# Altium PCB ATT-Light.PcbDoc (part 2 of 2)
Units mm, origin at the board's own origin, x right, y up, seen from the top; angles counter-clockwise.
Board outline 140.3 x 94.24 mm, 2 copper layers (Top Layer, Bottom Layer); 125 components, 78 nets, 490 pads, 126 vias.
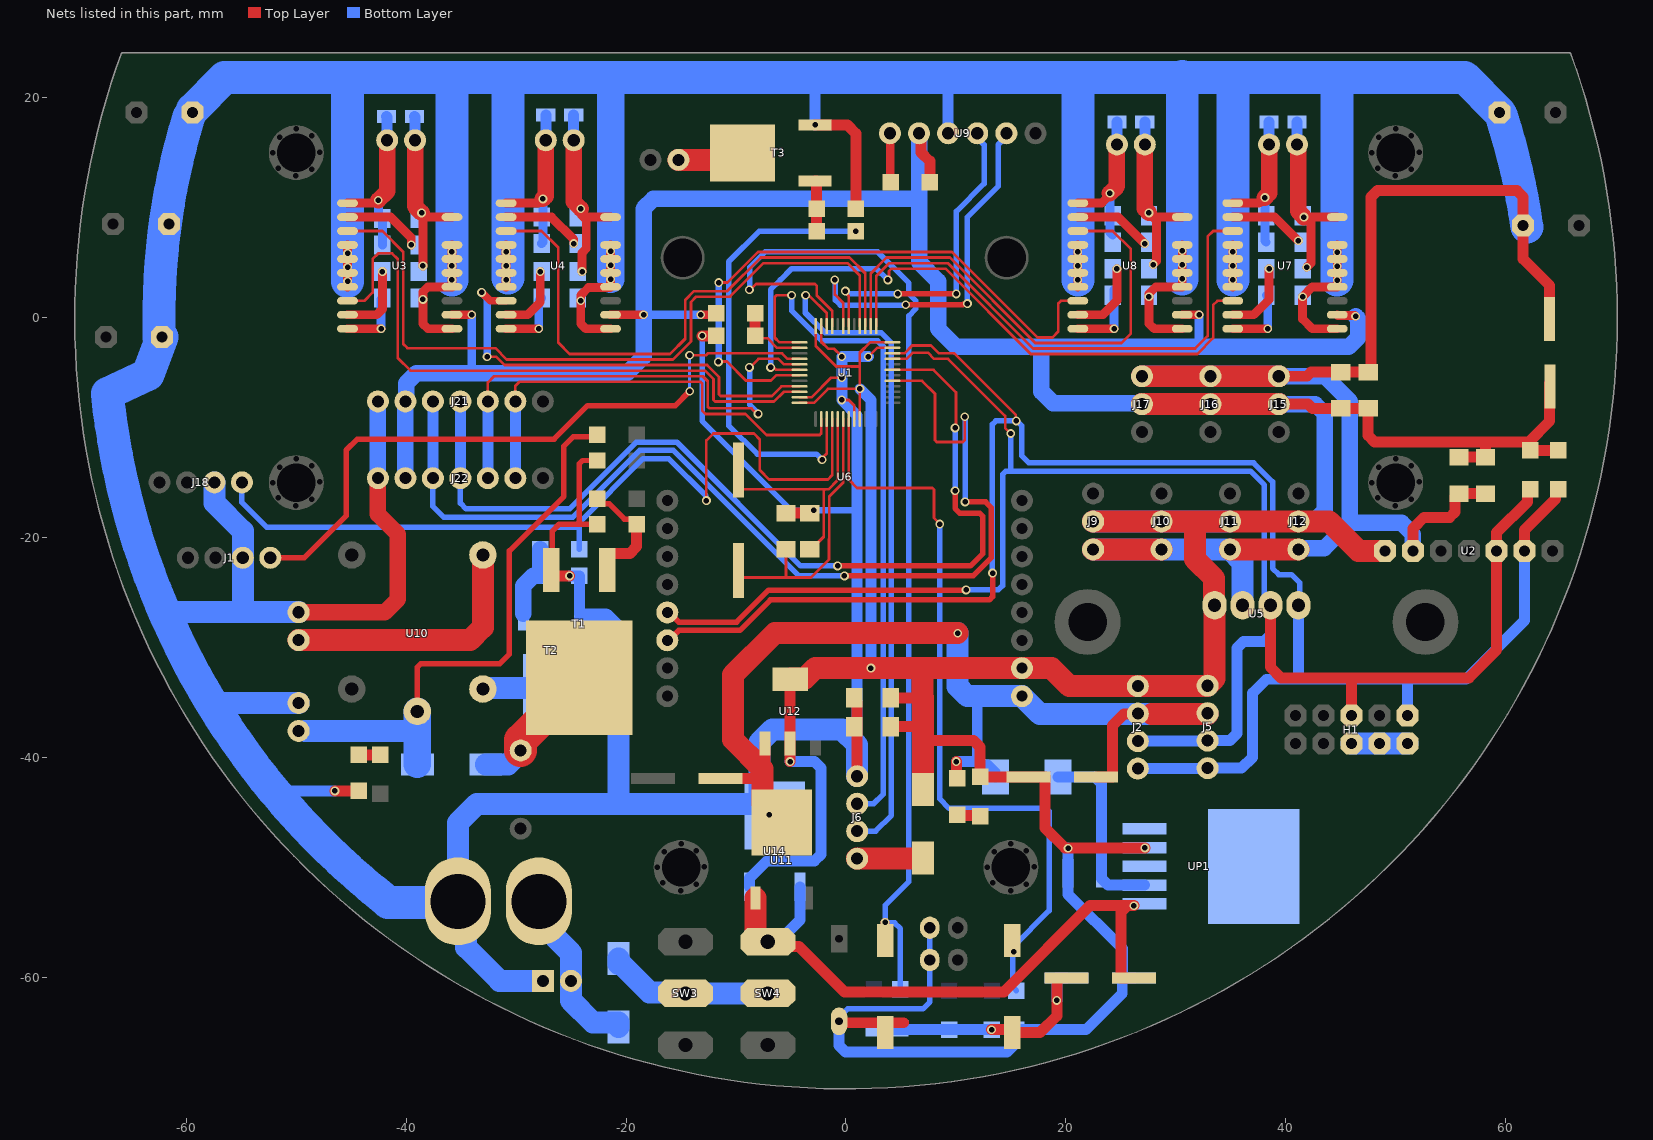
[diagram p2: the nets of this part, all layers, seen from the top]

## Via types
v1: diameter 0.8, hole 0.5, Top Layer to Bottom Layer, tented both sides, 126 vias

## Nets (pads, with @x,y where several pads share a name; then routed paths per layer and width w, separated by ;. In a path a pad name is that pad's centre, name@x,y a point inside that pad or via, vN(x,y) a via of type N, cw(c..) or ccw(c..) an arc to the next point about the centre after c; other vN are vias at no path point) (continued)
GND: C1.2 C2.2 C9.2 C10.2 C17.1 C18.2 C19.1 C20.1 C21.1 C22.1 C23.1 C24.2 C25.1 C26.1 C27.1 C28.1 C29.1 C30.1 C31.1 C32.1 C33.1 C35.1 D1.1 D2.1 D3.1 D4.1 D6.1 D7.1 D8.1 D9.1 D11.2 D13.2 D14.1 H1.6 H1.8 H1.10 J1.3 J2.2 J5.2 J6.1 J9.1 J10.1 J11.1 J12.1 J13.2 J14.2 J15.1 J16.1 J17.1 J18.3 j19.2 J20.2 J21.1 J22.1 R8.1 R9.2 R10.2 R11.2 R12.2 R15.1 R16.1 R17.2 R21.2 SW2.1 T1.3 T2.3 T3.3 U1.8 U1.23 U1.35 U1.47 U2.2 U3.1 U3.4 U3.5 U3.6 U3.7 U3.14 U3.15 U3.16 U3.17 U4.1 U4.4 U4.5 U4.6 U4.7 U4.14 U4.15 U4.16 U4.17 U5.2 U6.9 U7.1 U7.4 U7.5 U7.6 U7.7 U7.14 U7.15 U7.16 U7.17 U8.1 U8.4 U8.5 U8.6 U8.7 U8.14 U8.15 U8.16 U8.17 U9.3 U11.4 U12.1 U14.4 UP1.3 UP1.5 UP1.6 | length 997.6
  Top Layer w0.25: U1.47@-4.225,-7.25 -3.131,-7.25 -1.342,-5.461 v1(-0.381,-5.461) ; U1.35@-2.25,-0.775 -2.25,-2.195 -1.622,-2.823 -1.114,-2.823 v1(-0.381,-3.556) ; v1(-0.381,-7.493) 0.254,-7.493 0.75,-7.989 U1.8@0.75,-9.225 ; v1(2.032,-3.556) 2.838,-2.75 U1.23@4.225,-2.75
  Top Layer w0.5: T1.3@-26.797,-22.941 -26.729,-22.873 -26.729,-19.441 -26.084,-18.796 -24.257,-18.796 ; R15.1@-22.606,-18.796 -24.257,-18.796 ; R16.1@-22.606,-12.997 -23.964,-12.997 -24.257,-13.29 -24.257,-18.796
  Top Layer w0.8: U3.17@-45.339,2.794 v1(-45.339,3.302) U3.16@-45.339,4.064 v1(-45.339,4.572) U3.15@-45.339,5.334 v1(-45.339,5.842) U3.14@-45.339,6.604 ; U3.1@-35.839,-1.016 -38.012,-1.016 -38.481,-0.547 v1(-38.481,1.651) -38.481,2.325 -38.012,2.794 U3.4@-35.839,2.794 v1(-35.839,3.429) U3.5@-35.839,4.064 U3.6@-35.839,5.334 U3.7@-35.839,6.604 ; U4.17@-30.912,2.794 v1(-30.912,3.429) U4.16@-30.912,4.064 v1(-30.912,4.699) U4.15@-30.912,5.334 v1(-30.912,5.969) U4.14@-30.912,6.604 ; U4.1@-21.412,-1.016 -23.661,-1.016 -24.13,-0.547 v1(-24.13,1.524) -24.13,2.032 -23.418,2.744 -21.462,2.744 U4.4@-21.412,2.794 v1(-21.412,3.505) U4.5@-21.412,4.064 v1(-21.412,4.775) U4.6@-21.412,5.334 v1(-21.412,6.045) U4.7@-21.412,6.604 ; U8.17@21.084,2.794 U8.16@21.084,4.064 U8.15@21.084,5.334 U8.14@21.084,6.604 ; U8.1@30.584,-1.016 28.028,-1.016 27.559,-0.547 v1(27.559,1.905) 27.559,2.159 28.194,2.794 U8.4@30.584,2.794 v1(30.584,3.533) U8.5@30.584,4.064 v1(30.584,4.803) U8.6@30.584,5.334 v1(30.584,6.073) U8.7@30.584,6.604 ; U7.17@35.179,2.794 v1(35.179,3.429) U7.16@35.179,4.064 v1(35.179,4.699) U7.15@35.179,5.334 v1(35.179,5.969) U7.14@35.179,6.604 ; U7.1@44.679,-1.016 42.418,-1.016 41.529,-0.127 v1(41.529,1.905) 42.418,2.794 U7.4@44.679,2.794 v1(44.679,3.404) U7.5@44.679,4.064 v1(44.679,4.674) U7.6@44.679,5.334 v1(44.679,5.944) U7.7@44.679,6.604
  Top Layer w1: v1(-46.482,-43.053) D11.2@-44.323,-43.053 ; T1.3@-26.797,-22.941 -26.797,-23.245 -26.547,-23.495 v1(-25.146,-23.495) ; v1(-13.081,-1.651) R8.1@-11.811,-1.651 ; C20.1@-11.43,-41.91 -7.592,-41.91 -7.38,-41.91 U12.1@-7.38,-38.739 ; C24.2@-5.461,-17.78 C18.2@-3.302,-17.78 ; v1(-2.798,17.526) 0.127,17.526 0.889,16.764 R21.2@0.889,9.906 ; C30.1@0.762,-34.586 0.762,-34.711 1.016,-34.965 J6.1@1.016,-41.713 ; v1(10.033,-40.386) 10.033,-41.834 D13.2@10.109,-41.91 ; v1(13.237,-64.77) 14.863,-64.77 15.113,-65.02 SW2.1@15.113,-65.024 17.653,-65.024 19.177,-63.5 v1(19.177,-62.103) 19.177,-60.071 C31.1@20.066,-60.071 ; C21.1@22.733,-41.783 24.233,-41.783 24.233,-37.108 25.273,-36.068 27.813,-36.068 ; J15.1@39.362,-5.334 41.935,-5.334 42.316,-4.953 C32.1@44.994,-4.953 C33.1@47.498,-4.953 ; C33.1@47.502,-4.953 C33.1@47.498,-4.953 ; C33.1@47.752,-4.703 47.752,10.971 48.338,11.557 61.009,11.557 61.595,10.971 C26.1@61.595,8.382 61.595,5.334 64.008,2.921 C22.1@64.008,-0.127 ; C33.1@47.873,-4.578 47.873,-4.703 47.623,-4.953 C33.1@47.498,-4.953 ; U2.2@51.562,-21.209 51.562,-19.177 52.578,-18.161 54.913,-18.161 55.378,-17.696 55.378,-16.252 55.628,-16.002 C17.1@55.753,-16.002 C19.1@58.166,-16.002
  Top Layer w1.5: J13.2@-49.784,-26.797 -41.939,-26.797 -40.767,-25.625 -40.767,-19.685 -42.575,-17.877 J22.1@-42.575,-14.605
  Top Layer w2: U11.4@-5.842,-45.937 -7.592,-44.187 -7.592,-41.91 -7.592,-41.049 -10.287,-38.354 -10.287,-32.512 -6.477,-28.702 v1(10.16,-28.702) ; J9.1@22.479,-21.082 J10.1@28.702,-21.082 ; J17.1@26.921,-5.334 J16.1@33.141,-5.334 J15.1@39.362,-5.334 ; 27.813,-36.068 J5.2@32.893,-36.068 ; J11.1@34.925,-21.082 J12.1@41.148,-21.082
  Top Layer w3: j19.2@-35.433,-53.213 j19.2@-35.306,-53.086
  Bottom Layer w0.5: v1(-13.081,-1.651) -13.081,-9.398 -4.953,-17.526 v1(-2.921,-17.526)
  Bottom Layer w0.6: v1(-2.921,-17.526) 1.016,-17.526
  Bottom Layer w1: -52.815,-42.075 -52.472,-42.418 -51.837,-43.053 v1(-46.482,-43.053) ; v1(-25.146,-23.495) -24.26,-23.495 R17.2@-24.257,-23.498 T2.3@-24.257,-26.938 ; v1(-2.798,17.526) -2.798,21.844 ; 1.016,-38.862 1.016,-17.526 1.016,-8.89 v1(-0.381,-7.493) v1(-0.381,-5.461) v1(-0.381,-3.556) v1(2.032,-3.556) ; 3.81,-64.77 4.953,-64.77 R12.2@9.398,-64.77 10.983,-64.77 v1(13.237,-64.77) ; U9.3@9.289,16.764 9.289,21.481 9.652,21.844 ; v1(10.033,-40.386) 11.938,-40.386 ; 11.938,-34.431 11.938,-40.386 ; D14.1@13.589,-41.783 13.589,-41.433 12.864,-40.708 12.514,-40.708 12.192,-40.386 11.938,-40.386 ; v1(19.177,-62.103) 19.177,-60.071 C35.1@20.066,-60.071
  Bottom Layer w1.5: -66.793,-9.994 -66.753,-10.033 ; J22.1@-42.671,-14.701 J22.1@-42.575,-14.605 J21.1@-42.575,-7.62 ; J15.1@39.362,-5.334 43.561,-5.334 45.819,-7.592 45.819,-18.642 ; J12.1@41.148,-21.082 41.244,-20.986 43.475,-20.986 ; 43.502,-20.986 45.819,-18.669 50.546,-18.669 51.562,-19.685 U2.2@51.562,-21.209
  Bottom Layer w2: -64.068,-21.356 -63.834,-21.59 ; -61.873,-27.061 -61.608,-26.797 -54.864,-26.797 ; -60.927,-29.128 -60.845,-29.21 ; J18.3@-57.444,-14.986 -57.444,-16.851 -54.864,-19.431 J1.3@-54.864,-21.844 -54.864,-26.797 ; -57.15,-35.052 J14.2@-49.784,-35.052 ; J13.2@-49.784,-26.797 -54.864,-26.797 ; J20.2@-27.559,-60.325 -31.496,-60.325 -34.541,-57.28 -34.541,-53.851 j19.2@-35.306,-53.086 -35.306,-45.974 -33.56,-44.228 -20.701,-44.228 ; T2.3@-23.757,-27.438 -21.938,-27.438 -20.701,-28.675 -20.701,-44.228 ; U14.4@-6.763,-44.989 U14.4@-7.524,-44.228 ; -6.702,-37.465 -7.874,-38.637 -7.874,-43.878 U14.4@-7.524,-44.228 ; -6.702,-37.465 -0.381,-37.465 1.016,-38.862 J6.1@1.016,-41.713 ; v1(10.16,-28.702) 10.16,-33.556 11.035,-34.431 11.938,-34.431 U6.9@16.002,-34.431 17.639,-36.068 J5.2@32.893,-36.068 ; J9.1@22.479,-21.082 J10.1@28.702,-21.082 J11.1@34.925,-21.082 36.068,-22.225 U5.2@36.068,-26.162 U5.2@36.03,-26.2 ; J17.1@26.921,-5.334 J16.1@33.141,-5.334 J15.1@39.362,-5.334 ; H1.6@45.974,-38.735 H1.8@48.514,-38.735 H1.10@51.054,-38.735 ; -20.701,-44.228 U14.4@-7.524,-44.228
  Bottom Layer w2.5: v1(-21.412,3.505) v1(-21.412,4.775) v1(-21.412,6.045) -21.412,21.92
  Bottom Layer w3: C29.1@-62.473,-1.822 cw(c0,0) C28.1@-59.769,18.273 ; C29.1@-62.234,-1.778 -62.276,-1.894 -63.479,-5.177 -67.184,-6.895 ccw(c-0.037,0.005) -41.875,-52.965 ; C28.1@-59.436,18.923 -56.515,21.844 -45.339,21.844 -39.116,21.844 -35.839,21.844 ; v1(-45.339,3.302) v1(-45.339,4.572) v1(-45.339,5.842) -45.339,21.717 ; -41.656,-53.213 j19.2@-35.433,-53.213 ; v1(-35.839,3.429) v1(-35.839,4.699) v1(-35.839,5.969) -35.839,21.844 ; v1@-30.734,3.607 v1@-30.734,5.791 ; v1@-30.734,6.147 -30.734,21.844 ; v1(21.082,3.429) v1(21.082,4.699) v1(21.082,5.969) 21.082,21.844 ; v1(30.584,3.533) v1(30.584,4.803) v1(30.584,6.073) 30.584,21.844 ; 30.584,21.948 30.584,21.844 ; v1(35.179,3.429) v1(35.179,4.699) v1(35.179,5.969) 35.179,21.844 ; v1(44.679,3.404) v1(44.679,4.674) v1(44.679,5.944) 44.679,21.819 ; C25.1@59.436,18.669 56.261,21.844 44.679,21.844 41.148,21.844 38.481,21.844 35.179,21.844 ; C25.1@59.589,18.419 cw(c2.328,-0.068) C26.1@61.922,8.247 ; -35.839,21.844 -30.734,21.844 ; -30.734,21.844 -27.305,21.844 -24.765,21.844 -21.412,21.844 -2.798,21.844 9.652,21.844 21.082,21.844 ; 21.082,21.844 24.511,21.844 27.178,21.844 30.584,21.844 ; 30.584,21.844 35.179,21.844
  other v1: -6.985,-45.212
ID: R4.1 R8.2 U1.38 | length 5.6
  Top Layer w0.25: R8.2@-8.255,-1.651 -8.038,-1.868 -7.15,-1.868 -6.267,-2.75 -4.825,-2.75 U1.38@-4.225,-2.75
  Top Layer w1: R8.2@-8.255,-1.231 R4.1@-8.255,-0.127
IN1: U1.28 U3.13 | length 67.1
  Top Layer w0.25: U3.13@-45.339,7.874 -42.164,7.874 -40.267,5.977 -40.267,-2.405 -39.895,-2.777 -31.894,-2.777 -30.861,-3.81 -15.748,-3.81 -14.106,-2.168 -14.106,1.416 -13.617,1.905 -10.541,1.905 -7.493,4.953 0.127,4.953 1.25,3.83 U1.28@1.25,-0.775
IN2: U1.27 U4.13 | length 53.4
  Top Layer w0.25: U4.13@-30.912,7.874 -27.686,7.874 -26.162,6.35 -26.162,-2.286 -25.146,-3.302 -16.002,-3.302 -14.622,-1.922 -14.622,1.607 -13.824,2.405 -10.803,2.405 -7.747,5.461 0.326,5.461 1.75,4.037 U1.27@1.75,-0.775
IN3: U1.26 U8.13 | length 46.1
  Top Layer w0.25: U1.26@2.25,-1.016 2.25,4.028 3.691,5.469 9.445,5.469 17.216,-2.302 25.064,-2.302 25.908,-1.458 25.908,6.223 24.257,7.874 U8.13@21.084,7.874
IN4: U1.25 U7.13 | length 50.4
  Top Layer w0.25: U1.25@2.75,-0.775 2.75,3.766 3.937,4.953 9.254,4.953 17.009,-2.802 31.756,-2.802 32.893,-1.665 32.893,7.366 33.401,7.874 U7.13@35.179,7.874
MUX_ADD1: J21.3 J22.3 U1.17 | length 97.1
  Top Layer w0.25: U1.17@4.225,-5.75 6.924,-5.75 8.096,-6.922 8.096,-11.144 8.255,-11.303 10.649,-11.303 10.795,-11.157 v1(10.795,-9.017)
  Top Layer w0.5: v1(-0.138,-23.495) 11.557,-23.495 13.208,-21.844 13.208,-17.272 12.7,-16.764 v1(10.825,-16.764)
  Bottom Layer w0.5: J22.3@-37.575,-14.605 -37.575,-17.162 -36.588,-18.149 -24.835,-18.149 -18.763,-12.077 -15.705,-12.077 -4.287,-23.495 v1(-0.138,-23.495) ; v1(10.825,-16.764) v1@10.825,-9.047
  Bottom Layer w1: J22.3@-37.575,-14.605 J21.3@-37.575,-7.62
MUX_ADD2: J21.4 J22.4 U1.19 | length 88.1
  Top Layer w0.25: U1.19@4.225,-4.75 7.966,-4.75 10.016,-6.8 10.016,-9.938 v1(9.921,-10.033)
  Top Layer w0.5: v1(-0.762,-22.591) 11.318,-22.591 12.446,-21.463 12.446,-18.073 12.153,-17.78 10.34,-17.78 9.921,-17.361 9.921,-16.39 9.929,-16.382 9.929,-15.756 v1(9.921,-15.748)
  Bottom Layer w0.5: J22.4@-35.075,-14.605 -35.075,-16.868 -34.544,-17.399 -25.146,-17.399 -19.074,-11.327 -15.395,-11.327 -4.131,-22.591 v1(-0.762,-22.591) ; v1(9.921,-15.748) v1(9.921,-10.033)
  Bottom Layer w1: J22.4@-35.075,-14.605 J21.4@-35.075,-7.62
MUX_ADD3: J21.5 J22.5 U1.41 | length 45.9
  Top Layer w0.25: J21.5@-32.575,-7.62 -32.575,-5.905 -32.004,-5.334 -13.028,-5.334 -12.573,-5.789 -12.573,-8.109 -12.427,-8.255 -8.589,-8.255 -8.081,-8.763 v1(-8.001,-8.763) ; v1(-8.778,-4.529) -8.735,-4.529 -7.956,-3.75 -6.156,-3.75 -5.656,-4.25 -4.825,-4.25 U1.41@-4.225,-4.25
  Bottom Layer w0.5: v1(-8.778,-4.529) -8.763,-4.544 -8.763,-7.92 -8.001,-8.682 v1(-8.001,-8.763)
  Bottom Layer w1: J22.5@-32.575,-14.605 J21.5@-32.575,-7.62
MUX_ADD4: J21.6 J22.6 U1.2 | length 41.2
  Top Layer w0.25: J21.6@-30.075,-7.62 -30.075,-6.199 -29.718,-5.842 -13.227,-5.842 -13.081,-5.988 -13.081,-8.454 -12.772,-8.763 -9.144,-8.763 -7.239,-10.668 -2.396,-10.668 -2.25,-10.522 U1.2@-2.25,-9.225
  Bottom Layer w1: J22.6@-30.075,-14.605 J21.6@-30.075,-7.62
NetC1_1: C1.1 U4.20 | length 5.9
  Top Layer w0.8: U4.20@-30.912,-1.016 v1(-27.94,-1.016)
  Bottom Layer w0.8: v1(-27.94,-1.016) -27.94,1.524 C1.1@-27.686,1.778
NetC2_1: C2.1 U3.20 | length 5.9
  Top Layer w0.8: U3.20@-45.339,-1.016 v1(-42.291,-1.016)
  Bottom Layer w0.8: v1(-42.291,-1.016) -42.291,1.651 C2.1@-42.164,1.778
NetC3_1: C3.1 U3.12 | length 7.3
  Top Layer w0.8: U3.12@-45.339,9.144 -41.402,9.144 -39.535,7.277 v1(-39.535,6.604)
NetC3_2: C3.2 C5.2 D1.2 J3.2 U3.11 | length 15.1
  Top Layer w0.8: U3.11@-45.339,10.414 -42.799,10.414 v1(-42.545,10.668)
  Top Layer w1.5: v1(-42.545,10.668) -41.732,11.481 J3.2@-41.732,16.129
  Bottom Layer w0.8: v1(-42.545,10.668) -42.514,10.637 -42.514,9.367 C5.2@-42.164,9.017 C3.2@-42.164,6.604
  Bottom Layer w1: D1.2@-41.783,18.288 -41.758,18.263 -41.758,16.154 J3.2@-41.732,16.129
NetC4_1: C4.1 U4.12 | length 7.4
  Top Layer w0.8: U4.12@-30.912,9.144 -26.797,9.144 -24.765,7.112 v1(-24.765,6.731)
NetC4_2: C4.2 C6.2 D2.2 J4.2 U4.11 | length 15.4
  Top Layer w0.8: U4.11@-30.912,10.414 -27.94,10.414 v1(-27.559,10.795)
  Top Layer w1.5: v1(-27.559,10.795) -27.305,11.049 J4.2@-27.305,16.129
  Bottom Layer w0.8: C4.2@-27.686,6.731 -27.559,6.858 v1(-27.559,10.795)
  Bottom Layer w1: J4.2@-27.305,16.129 D2.2@-27.305,18.415
NetC5_1: C5.1 C7.1 D3.2 J3.1 U3.9 | length 16.8
  Top Layer w0.8: v1(-38.481,4.699) -38.481,9.398 v1(-38.608,9.525) -38.227,9.144 U3.9@-35.839,9.144
  Top Layer w1.5: J3.1@-39.192,16.129 -39.192,10.109 v1(-38.608,9.525)
  Bottom Layer w1: D3.2@-39.243,18.288 -39.218,18.263 -39.218,16.154 J3.1@-39.192,16.129
NetC6_1: C6.1 C8.1 D4.2 J4.1 U4.9 | length 17.3
  Top Layer w0.8: v1(-24.13,9.906) -24.13,9.398 -23.876,9.144 ; v1(-24.003,4.191) -24.003,5.899 -23.622,6.28 -23.622,8.89 -23.876,9.144 ; U4.9@-21.412,9.144 -23.876,9.144
  Top Layer w1.5: J4.1@-24.765,16.129 -24.765,10.541 v1(-24.13,9.906)
  Bottom Layer w1: J4.1@-24.765,16.129 D4.2@-24.765,18.415
NetC7_2: C7.2 U3.19 | length 6.8
  Top Layer w0.8: U3.19@-45.339,0.254 -42.672,0.254 -42.164,0.762 v1(-42.164,4.191)
NetC8_2: C8.2 U4.19 | length 6.4
  Top Layer w0.8: U4.19@-30.912,0.254 -28.956,0.254 -27.813,1.397 v1(-27.813,4.191)
NetC9_1: C9.1 U7.20 | length 6.3
  Top Layer w0.8: U7.20@35.179,-1.016 v1(38.354,-1.016)
  Bottom Layer w0.8: C9.1@38.227,2.032 38.354,1.905 v1(38.354,-1.016)
NetC10_1: C10.1 U8.20 | length 6.9
  Top Layer w0.8: U8.20@21.084,-1.016 v1(24.384,-1.016)
  Bottom Layer w0.8: v1(24.384,-1.016) C10.1@24.384,2.54
NetC11_1: C11.1 U7.12 | length 6.9
  Top Layer w0.8: U7.12@35.179,9.144 38.989,9.144 v1(41.148,6.985)
NetC11_2: C11.2 C13.2 D6.2 J7.2 U7.11 | length 14.3
  Top Layer w0.8: U7.11@35.179,10.414 37.592,10.414 v1(38.1,10.922)
  Top Layer w1.5: v1(38.1,10.922) 38.481,11.303 J7.2@38.481,15.748
  Bottom Layer w0.8: v1(38.1,10.922) 38.1,6.985 C11.2@38.227,6.858
  Bottom Layer w1: J7.2@38.481,15.748 D6.2@38.481,17.78
NetC12_1: C12.1 U8.12 | length 7.1
  Top Layer w0.8: U8.12@21.084,9.144 24.765,9.144 v1(27.178,6.731)
NetC12_2: C12.2 C14.2 D7.2 J8.2 U8.11 | length 14
  Top Layer w0.8: U8.11@21.084,10.414 23.234,10.414 24.003,11.183 v1(24.003,11.303)
  Top Layer w1.5: v1(24.003,11.303) 24.638,11.938 J8.2@24.638,15.748
  Bottom Layer w0.8: v1(24.003,11.303) 24.003,7.747 C12.2@24.257,7.493
  Bottom Layer w1: J8.2@24.638,15.748 D7.2@24.638,17.78
NetC13_1: C13.1 C15.1 D8.2 J7.1 U7.9 | length 17
  Top Layer w0.8: J7.1@41.021,15.748 J7.1@41.021,16.129 ; v1(41.656,9.144) 42.291,9.144 ; v1(41.91,4.572) 42.291,4.953 42.291,9.144 ; U7.9@44.679,9.144 42.291,9.144
  Top Layer w1.5: J7.1@41.021,15.748 41.148,15.621 41.148,9.652 v1(41.656,9.144)
  Bottom Layer w1: J7.1@41.021,15.748 D8.2@41.021,17.78
NetC14_1: C14.1 C16.1 D9.2 J8.1 U8.9 | length 16.2
  Top Layer w0.8: v1(27.559,9.525) 28.232,8.852 28.232,5.118 v1(27.94,4.826) ; 27.94,9.144 28.232,9.144 U8.9@30.584,9.144
  Top Layer w1.5: J8.1@27.178,15.748 27.178,9.906 v1(27.559,9.525)
  Bottom Layer w1: J8.1@27.178,15.748 D9.2@27.178,17.78
NetC15_2: C15.2 U7.19 | length 6.7
  Top Layer w0.8: U7.19@35.179,0.254 37.084,0.254 38.481,1.651 v1(38.481,4.445)
NetC16_2: C16.2 U8.19 | length 7
  Top Layer w0.8: U8.19@21.084,0.254 23.368,0.254 24.638,1.524 v1(24.638,4.445)
NetC31_2: C31.2 SW4.1 U11.1 U14.1 UP1.1 | length 57.8
  Top Layer w1: SW4.1@-7.112,-56.769 -6.695,-57.186 -4.282,-57.186 -0.127,-61.341 14.351,-61.341 22.203,-53.489 25.605,-53.489 ; C31.2@26.184,-60.068 25.019,-60.068 25.019,-54.075 25.605,-53.489 ; v1(26.184,-53.489) 25.605,-53.489
  Top Layer w2: U11.1@-8.242,-52.787 -8.242,-56.019 -7.492,-56.769 SW4.1@-7.112,-56.769
  Bottom Layer w1: SW4.1@-7.112,-56.769 -6.194,-56.769 -4.197,-54.772 U14.1@-4.197,-51.775
NetC34_1: C34.1 D14.2 UP1.2 | length 17
  Bottom Layer w1: D14.2@19.289,-41.783 22.655,-41.783 23.241,-42.369 23.241,-51.025 23.827,-51.611 UP1.2@27.169,-51.611
NetD5_1: D5.1 J6.4 | length 5.7
  Top Layer w2: J6.4@1.016,-49.213 6.604,-49.213 D5.1@6.604,-49.149
NetD10_1: D10.1 R5.2 T1.4 | length 12.6
  Top Layer w3: R5.2@-29.591,-39.37 -29.591,-38.425 -24.257,-33.091 T1.4@-24.257,-32.741
  Bottom Layer w2: D10.1@-32.766,-40.64 -30.763,-40.64 -29.591,-39.468 R5.2@-29.591,-39.37
NetD11_1: D11.1 R18.1 | length 2
  Top Layer w1: D11.1@-44.323,-39.751 -44.313,-39.761 -42.364,-39.761 R18.1@-42.355,-39.77
NetD12_1: D12.1 j19.1 J20.1 | length 15.8
  Bottom Layer w2: j19.1@-27.94,-53.086 -27.94,-54.864 -25.019,-57.785 -25.019,-62.103 -23.025,-64.097 -20.701,-64.097 D12.1@-20.701,-64.516
NetD12_2: D12.2 SW3.2 SW4.2 | length 15.2
  Bottom Layer w2: D12.2@-20.701,-58.293 -20.701,-58.793 -20.455,-58.793 -17.876,-61.372 -14.701,-61.372 SW3.2@-14.605,-61.468 SW4.2@-7.112,-61.468
NetD13_1: D13.1 R19.1 | length 2.1
  Top Layer w1: D13.1@10.109,-45.212 10.173,-45.276 12.128,-45.276 R19.1@12.192,-45.339
NetJ13_1: J13.1 U10.1 | length 23.8
  Top Layer w2: J13.1@-49.784,-29.337 -34.199,-29.337 -33.027,-28.165 -33.027,-21.597 U10.1@-33.02,-21.59
NetJ23_2: J23.2 T3.4 | length 6.1
  Top Layer w2: J23.2@-15.24,14.351 -10.033,14.351 T3.4@-9.398,14.986
NetR3_2: R3.2 U9.1 | length 4.5
  Top Layer w0.8: U9.1@3.992,16.764 4.028,16.728 4.028,12.355 R3.2@4.064,12.319
NetR7_2: R7.2 R15.2 T1.1 | length 10.8
  Top Layer w0.5: R7.2@-22.606,-16.468 -22.122,-16.952 -21.529,-16.952 -20.148,-18.333 -19.513,-18.333 R15.2@-19.05,-18.796
  Top Layer w1: T1.1@-21.717,-22.941 -21.717,-21.691 -21.467,-21.441 -19.663,-21.441 -19.05,-20.828 R15.2@-19.05,-18.796
NetR14_1: R14.1 R17.1 T2.1 | length 6.9
  Bottom Layer w1.5: T2.1@-29.337,-26.938 -29.337,-24.376 -28.458,-23.498 R17.1@-27.813,-23.498 R14.1@-27.813,-21.082
NetR20_1: R20.1 R21.1 T3.1 | length 4.7
  Top Layer w1: T3.1@-2.798,12.446 -2.667,12.446 R21.1@-2.667,9.906 R20.1@-2.667,7.874
NetT2_4: T2.4 U10.4 | length 6.3
  Bottom Layer w2: U10.4@-33.02,-33.782 -32.924,-33.686 -26.945,-33.686 T2.4@-26.797,-33.538
NRST: R13.2 SW2.2 U1.7 | length 70.2
  Top Layer w0.25: U1.7@0.25,-9.225 0.25,-14.728 1.016,-15.494 7.855,-15.494 8.001,-15.64 8.001,-18.233 8.524,-18.756 v1(8.524,-18.781)
  Bottom Layer w0.5: v1(8.524,-18.781) 8.509,-18.796 8.509,-43.754 9.383,-44.628 18.173,-44.628 18.466,-44.921 18.466,-53.944 15.181,-57.229 15.181,-57.657 15.181,-60.904 R13.2@15.491,-61.214
  other v1: 15.239,-57.657
OSC_IN: C18.1 U1.5 U13.2 | length 21
  Top Layer w0.25: U13.2@-9.779,-15.621 -1.905,-15.621 ; C18.1@-3.302,-21.082 -3.177,-21.082 -2.024,-19.929 -2.024,-15.74 -1.905,-15.621 ; U1.5@-0.75,-9.225 -0.75,-14.775 -1.596,-15.621 -1.905,-15.621
OSC_OUT: C24.1 U1.6 U13.1 | length 25.7
  Top Layer w0.25: U13.1@-9.714,-24.765 -9.714,-23.942 -9.404,-23.632 -5.461,-23.632 ; C24.1@-5.461,-21.082 -5.461,-23.632 ; U1.6@-0.25,-9.225 -0.25,-14.982 -1.524,-16.256 -1.524,-20.136 -1.541,-20.153 -1.541,-21.988 -3.185,-23.632 -5.461,-23.632
PWM1: U1.46 U3.18 | length 57
  Top Layer w0.25: U3.18@-45.339,1.524 -43.815,1.524 -43.053,2.286 -43.053,5.334 -42.545,5.842 -41.275,5.842 -40.767,5.334 -40.767,-3.683 -39.624,-4.826 -12.829,-4.826 -12.056,-5.599 -12.056,-7.483 -11.91,-7.629 -6.539,-7.629 -5.661,-6.75 U1.46@-4.225,-6.75
PWM2: U1.45 U4.18 | length 39.8
  Top Layer w0.25: v1(-32.639,-3.556) -31.822,-3.556 -31.06,-4.318 -12.63,-4.318 -11.556,-5.392 -11.556,-6.983 -11.41,-7.129 -6.747,-7.129 -5.868,-6.25 U1.45@-4.225,-6.25
  Top Layer w0.7: v1(-33.147,2.286) -33.12,2.286 -32.358,1.524 U4.18@-30.912,1.524
  Bottom Layer w0.7: v1(-33.147,2.286) -33.147,2.259 -32.639,1.751 v1(-32.639,-3.556)
PWM3: U1.43 U8.18 | length 55.4
  Top Layer w0.25: v1(-11.608,-4.029) -11.578,-3.999 -10.833,-3.999 -9.117,-5.715 -6.815,-5.715 -6.35,-5.25 U1.43@-4.225,-5.25 ; v1(-11.572,3.184) -10.786,3.184 -8.001,5.969 9.652,5.969 17.423,-1.802 18.772,-1.802 19.304,-1.27 19.304,1.27 19.558,1.524 U8.18@21.084,1.524
  Bottom Layer w0.6: v1(-11.608,-4.029) -11.59,-4.011 -11.59,3.166 v1(-11.572,3.184)
PWM4: U1.42 U7.18 | length 60.8
  Top Layer w0.25: v1(-6.858,-4.529) -6.753,-4.634 -6.477,-4.634 -6.361,-4.75 U1.42@-4.225,-4.75 ; v1(3.81,3.429) 3.915,3.534 3.915,4.224 4.144,4.453 9.047,4.453 16.802,-3.302 31.963,-3.302 33.393,-1.872 33.393,1.143 33.774,1.524 U7.18@35.179,1.524
  Bottom Layer w0.5: v1(-6.858,-4.529) -6.858,2.54 -5.969,3.429 -4.953,4.445 2.794,4.445 v1(3.81,3.429)
RCJ_COM: J1.4 U1.40 | length 61.5
  Top Layer w0.25: v1(-14.224,-3.429) -12.755,-3.429 -12.576,-3.25 -5.825,-3.25 -5.325,-3.75 U1.40@-4.225,-3.75
  Top Layer w0.5: J1.4@-52.364,-21.844 -49.276,-21.844 -45.466,-18.034 -45.466,-12.065 -44.45,-11.049 -26.543,-11.049 -23.495,-8.001 -15.522,-8.001 v1(-14.212,-6.691)
  Bottom Layer w0.25: v1@-14.224,-6.731 v1(-14.224,-3.429)
RX: U1.30 U9.4 | length 29.4
  Top Layer w0.25: v1(-0.054,2.416) -0.054,2.267 0.25,1.963 U1.30@0.25,-0.775
  Top Layer w0.5: v1(4.699,2.159) v1(10.033,2.159)
  Bottom Layer w0.5: v1(-0.054,2.416) 0.027,2.416 0.284,2.159 v1(4.699,2.159) ; v1(10.033,2.159) 10.033,9.652 12.573,12.192 12.573,15.723 11.938,16.358 U9.4@11.938,16.764
SCL: H1.5 J2.3 J5.3 R1.1 U1.21 U2.5 U5.3 U6.5 | length 167.1
  Top Layer w0.25: U1.21@4.225,-3.75 5.521,-3.75 6.079,-3.192 7.459,-3.192 8.017,-3.75 9.28,-3.75 14.478,-8.948 14.478,-10.033 v1(14.986,-10.541)
  Top Layer w0.5: U6.5@-16.256,-26.811 -16.088,-26.811 -15.213,-27.686 -9.951,-27.686 -7.042,-24.777 10.91,-24.777 v1(10.922,-24.765)
  Top Layer w1: U5.3@38.608,-26.162 38.608,-31.799 39.575,-32.766 46.101,-32.766 ; H1.5@45.974,-36.195 45.974,-32.893 46.101,-32.766 ; R1.1@62.23,-15.621 61.98,-15.871 61.98,-16.76 59.182,-19.558 U2.5@59.182,-21.209 59.182,-30.226 56.642,-32.766 46.101,-32.766
  Bottom Layer w0.3: U5.3@38.608,-26.162 U5.3@38.608,-25.448
  Bottom Layer w0.5: v1(10.922,-24.765) 13.843,-24.765 14.239,-24.369 14.239,-14.251 14.532,-13.958 14.986,-13.958 ; v1(14.986,-10.541) 14.986,-13.958 ; U5.3@38.608,-26.162 38.058,-25.612 38.058,-15.243 36.773,-13.958 14.986,-13.958
  Bottom Layer w1: J2.3@26.543,-38.521 26.563,-38.501 32.873,-38.501 J5.3@32.893,-38.481 34.925,-38.481 35.56,-37.846 35.56,-30.05 36.146,-29.464 38.022,-29.464 38.608,-28.878 U5.3@38.608,-26.162
SDA: H1.9 J2.4 J5.4 R2.1 U1.22 U2.6 U5.4 U6.6 | length 171.8
  Top Layer w0.25: U1.22@4.225,-3.25 5.314,-3.25 6.024,-2.54 7.737,-2.54 8.447,-3.25 9.854,-3.25 15.45,-8.846 15.45,-9.354 v1(15.494,-9.398)
  Top Layer w0.5: U6.6@-16.256,-29.351 -16.116,-29.351 -15.213,-28.448 -9.652,-28.448 -6.873,-25.669 13.042,-25.669 13.335,-25.376 v1(13.335,-23.241)
  Top Layer w1: U2.6@61.722,-21.209 61.722,-19.304 64.52,-16.506 64.52,-15.871 R2.1@64.77,-15.621
  Bottom Layer w0.5: v1(13.335,-23.241) 13.311,-23.217 13.311,-9.715 13.628,-9.398 v1(15.494,-9.398) 15.546,-9.398 16.002,-9.854 16.002,-12.573 16.637,-13.208 37.084,-13.208 38.808,-14.932 38.808,-22.806 39.37,-23.368 40.513,-23.368 41.275,-24.13 U5.4@41.275,-26.543
  Bottom Layer w1: J2.4@26.543,-41.021 26.563,-41.001 32.873,-41.001 J5.4@32.893,-40.981 35.981,-40.981 36.957,-40.005 36.957,-34.163 38.227,-32.893 50.8,-32.893 ; 41.148,-32.766 U5.4@41.148,-26.162 ; H1.9@51.054,-36.195 51.054,-33.147 50.8,-32.893 ; U2.6@61.722,-21.209 61.722,-27.559 56.388,-32.893 50.8,-32.893
SHOOT: J18.4 R14.2 U1.4 | length 77.5
  Top Layer w0.25: v1(-12.7,-16.637) -12.7,-11.176 -12.065,-10.541 -8.382,-10.541 -7.842,-11.081 -7.842,-13.875 -6.985,-14.732 -1.651,-14.732 -1.25,-14.331 U1.4@-1.25,-9.225
  Bottom Layer w0.5: J18.4@-54.944,-14.986 -54.944,-16.811 -52.705,-19.05 -24.257,-19.05 ; R14.2@-24.257,-21.082 -24.257,-19.05 ; v1(-12.7,-16.637) -12.757,-16.58 -12.757,-16.199 -16.129,-12.827 -18.453,-12.827 -24.257,-18.631 -24.257,-19.05
SPIN: R20.2 U1.3 | length 41.3
  Top Layer w0.25: v1(-2.18,-12.933) -2.18,-12.785 -1.75,-12.355 U1.3@-1.75,-9.225
  Bottom Layer w0.5: v1(-2.18,-12.933) -2.689,-12.424 -8.057,-12.424 -10.668,-9.814 -10.668,5.08 -7.874,7.874 v1(0.889,7.874)
SW1: R10.1 SW1.2 U1.33 | length 96.4
  Top Layer w0.25: v1(-8.778,2.54) -8.683,2.54 -8.175,3.048 -2.813,3.048 -2.667,2.902 -2.667,2.032 -1.25,0.615 U1.33@-1.25,-0.775
  Top Layer w0.8: v1(3.556,-54.991) 3.556,-55.638 SW1.2@3.683,-55.765
  Bottom Layer w0.5: v1(-8.778,2.54) -8.763,2.555 -8.763,4.566 -7.36,5.969 2.887,5.969 5.715,3.141 5.715,2.167 6.341,1.542 6.341,0.793 5.715,0.167 5.715,-51.308 3.556,-53.467 v1(3.556,-54.991) 3.613,-55.048 4.427,-55.048 4.953,-55.574 R10.1@4.953,-61.087
SWCLK: J6.2 U1.37 | length 62.3
  Top Layer w0.25: v1(-4.953,2.032) -6.331,2.032 -6.477,1.886 -6.477,-1.833 -6.06,-2.25 U1.37@-4.225,-2.25
  Bottom Layer w0.5: v1(-4.953,2.032) -4.953,0.628 -4.699,0.374 -2.202,-2.123 2.878,-2.123 3.374,-2.619 3.374,-43.362 2.523,-44.213 J6.2@1.016,-44.213
SWIO: J6.3 U1.34 | length 61
  Top Layer w0.25: v1(-3.683,2.032) -3.578,1.927 -3.269,1.927 -1.75,0.408 U1.34@-1.75,-0.775
  Bottom Layer w0.5: v1(-3.683,2.032) -3.706,2.009 -3.706,0.442 -1.891,-1.373 3.189,-1.373 4.124,-2.308 4.124,-45.279 2.69,-46.713 J6.3@1.016,-46.713
TX: U1.31 U9.5 | length 35.6
  Top Layer w0.25: v1(-1.016,3.429) -1.016,2.104 -0.25,1.338 U1.31@-0.25,-0.775
  Top Layer w0.5: v1(5.437,1.167) 10.611,1.167 10.656,1.213 10.992,1.213 v1(11.049,1.27)
  Bottom Layer w0.5: v1(-1.016,3.429) -0.959,3.372 -0.959,2.704 ; -0.958,2.703 -0.958,1.593 -0.508,1.143 5.413,1.143 v1(5.437,1.167) ; v1(11.049,1.27) 11.049,9.144 13.843,11.938 13.843,15.721 14.587,16.465 U9.5@14.587,16.764
VBOOST: D10.2 J14.1 R6.2 U10.5 | length 52.4
  Top Layer w0.5: U10.5@-38.989,-35.814 -38.989,-31.789 -38.696,-31.496 -31.496,-31.496 -30.607,-30.607 -30.607,-28.702 -30.607,-21.209 -25.654,-16.256 -25.654,-11.684 -24.829,-10.859 R6.2@-22.413,-10.859
  Bottom Layer w2: J14.1@-49.149,-37.592 -38.989,-37.592
  Bottom Layer w2.5: D10.2@-38.989,-40.64 -38.989,-37.592 U10.5@-38.989,-35.814
VCC: C17.2 C19.2 C21.2 C22.2 C23.2 C30.2 C32.2 C33.2 C34.2 C35.2 D5.2 J2.1 J5.1 J9.2 J10.2 J11.2 J12.2 J15.2 J16.2 J17.2 J21.2 J22.2 JP1.2 JP2.2 R1.2 R2.2 R3.1 R4.2 R13.1 R19.2 S1.2 SW1.1 U1.9 U1.24 U1.36 U1.48 U2.1 U3.2 U4.2 U5.1 U6.10 U7.2 U8.2 U9.2 U12.2 U12.4 U14.3 UP1.4 | length 534.8
  Top Layer w0.25: U1.48@-4.225,-7.75 -2.924,-7.75 -1.651,-6.477 v1@1.25,-6.477 ; U1.36@-2.75,-0.775 -2.75,-2.584 -0.889,-4.445 1.25,-4.445 ; U1.9@1.25,-9.225 v1@1.25,-6.477 ; U1.24@4.225,-2.25 2.195,-2.25 1.25,-3.195 1.25,-4.445 ; v1@1.25,-6.477 1.25,-4.445
  Top Layer w0.8: U3.2@-35.839,0.254 v1(-34.036,0.254) ; U4.2@-21.412,0.254 v1(-18.415,0.254) ; v1(-13.208,0.254) -11.938,0.254 R4.2@-11.811,0.381 ; U8.2@30.584,0.254 v1(32.114,0.254) ; U7.2@44.679,0.254 44.729,0.204 46.267,0.204 v1(46.344,0.127)
  Top Layer w1: v1(-5.08,-40.386) U12.2@-5.08,-38.739 U12.4@-5.08,-32.889 ; S1.2@-0.635,-64.135 5.211,-64.135 ; C23.2@4.064,-37.211 6.985,-37.211 ; C30.2@4.064,-34.586 6.943,-34.586 6.985,-34.544 ; U9.2@6.64,16.764 6.604,16.728 6.832,16.5 6.832,15.012 7.62,14.224 R3.1@7.62,12.319 ; 6.985,-38.608 7.112,-38.481 11.606,-38.481 12.192,-39.067 R19.2@12.192,-41.783 15.112,-41.783 15.115,-41.786 C21.2@16.615,-41.786 18.115,-41.786 18.115,-46.436 19.939,-48.26 v1(20.193,-48.26) v1@27.193,-48.26 ; J15.2@39.362,-7.874 42.037,-7.874 42.418,-8.255 C32.2@44.994,-8.255 C33.2@47.498,-8.255 47.498,-10.717 48.084,-11.303 58.166,-11.303 ; C17.2@55.753,-12.7 C19.2@58.166,-12.7 58.166,-11.303 ; R1.2@62.23,-12.065 R2.2@64.77,-12.065 ; C22.2@64.008,-5.969 64.008,-9.398 62.103,-11.303 58.166,-11.303
  Top Layer w2: U12.4@-5.08,-32.889 -5.005,-32.814 -3.731,-32.814 -2.794,-31.877 v1(2.273,-31.877) ; v1@2.286,-31.877 2.3,-31.891 7.112,-31.891 ; 6.943,-34.586 6.943,-32.06 7.112,-31.891 ; D5.2@6.985,-42.926 6.985,-38.608 6.985,-37.211 6.985,-34.544 ; J9.2@22.479,-18.542 J10.2@28.702,-18.542 31.75,-18.542 ; J2.1@26.543,-33.528 20.32,-33.528 18.683,-31.891 U6.10@16.002,-31.891 7.112,-31.891 ; J2.1@26.543,-33.521 32.853,-33.521 J5.1@32.893,-33.481 33.528,-32.846 U5.1@33.528,-26.162 33.49,-26.124 33.49,-23.711 31.75,-21.971 31.75,-18.542 ; J17.2@26.921,-7.874 J16.2@33.141,-7.874 J15.2@39.362,-7.874 ; U2.1@49.023,-21.209 46.609,-21.209 43.942,-18.542 J12.2@41.148,-18.542 J11.2@34.925,-18.542 31.75,-18.542
  Bottom Layer w0.5: S1.2@-0.635,-64.008 -0.635,-63.658 0.158,-62.865 6.985,-62.865 7.62,-62.23 JP1.2@7.62,-58.42 JP2.2@7.62,-55.499
  Bottom Layer w0.8: -34.036,-5.08 v1(-34.036,0.254) ; v1(-18.415,0.254) v1(-13.208,0.254) ; 32.073,-2.667 32.114,-2.626 v1(32.114,0.254)
  Bottom Layer w1: U14.3@-8.757,-51.775 -8.757,-50.975 -7.185,-49.403 -2.872,-49.403 -2.286,-48.817 -2.286,-40.972 -2.872,-40.386 v1(-5.08,-40.386) ; S1.2@-0.635,-64.076 -0.635,-66.216 -0.049,-66.802 14.656,-66.802 15.241,-66.216 15.241,-65.02 R13.1@15.491,-64.77 21.844,-64.77 25.126,-61.488 C35.2@25.126,-60.074 ; v1(1.27,-6.477) 2.273,-7.48 v1(2.273,-31.877) ; v1(20.193,-48.26) 20.197,-48.264 C34.2@20.197,-50.546 20.197,-52.455 25.131,-57.389 25.131,-60.074 C35.2@26.184,-60.074
  Bottom Layer w1.5: J22.2@-40.075,-14.605 J21.2@-40.075,-7.62 -39.979,-7.524 -39.979,-5.959 -39.101,-5.08 -34.036,-5.08 -19.939,-5.08 -18.415,-3.556 v1(-18.415,0.254) -18.415,9.916 -17.536,10.795 6.64,10.795 ; U9.2@6.64,16.764 6.64,10.795 ; J17.2@26.921,-7.778 18.827,-7.778 17.78,-6.731 17.78,-2.667 ; J15.2@39.362,-7.874 42.682,-7.874 43.561,-8.753 43.561,-17.526 42.641,-18.446 41.244,-18.446 J12.2@41.148,-18.542 ; v1(46.344,0.127) 46.609,-0.138 46.609,-1.788 45.73,-2.667 32.073,-2.667 17.78,-2.667 ; 6.64,10.795 6.64,5.044 8.382,3.302 8.382,-1.016 10.033,-2.667 17.78,-2.667
  Bottom Layer w2: J9.2@22.479,-18.542 J10.2@28.702,-18.542 J11.2@34.925,-18.542 ; J17.2@26.921,-7.874 J16.2@33.141,-7.874 J15.2@39.362,-7.874
  other v1: 27.193,-48.236
pads on no net: ?. ?.1 H1.1 H1.3 H1.4 H1.7 SW3.3 SW4.3 U1.1 U1.39 U2.3 U2.4 U2.7 U3.3 U3.8 U4.3 U4.8 U5. U6.1 U6.2 U6.3 U6.4 U6.7 U6.8 U6.11 U6.12 U6.13 U6.14 U6.15 U6.16 U6.17 U6.18 U7.3 U7.8 U8.3 U8.8 U9.6 U10.2
copper on no net: | length 1053.9
  Top Layer w0.3: -65.781,23.941 ccw(c-0.003,0) 65.776,23.941 -65.781,23.941 ; -59.182,-11.303 -59.182,11.176 -48.133,11.176 -48.133,-11.303 -59.182,-11.303 ; 49.149,-9.906 49.149,10.033 58.987,10.033 58.987,-9.906 49.149,-9.906
  Bottom Layer w0.3: -65.778,23.94 ccw(c0,-0.002) 65.778,23.94 -65.778,23.94 ; -59.182,-11.303 -48.133,-11.303 -48.133,11.176 -59.182,11.176 -59.182,-11.303 ; 49.149,-9.906 49.149,10.033 58.987,10.033 58.987,-9.906 49.149,-9.906

## Polygon pours and split planes (outlines as drawn)
GND on Bottom Layer "GND_L02_P001" (solid, pour order 1): -65.92,23.993 ccw(c0,0) 70.15,0 ccw(c0,0) 65.92,23.993 ccw(c65.778,23.941) 65.778,24.092 -65.778,24.092 ccw(c-65.778,23.941)
GND on Top Layer "GND_L01_P000" (solid, pour order 0): -65.92,23.993 ccw(c0,0) 70.15,0 ccw(c0,0) 65.92,23.993 ccw(c65.778,23.941) 65.778,24.092 -65.778,24.092 ccw(c-65.778,23.941)

## Silkscreen, mask and mechanical layers (free items; w line width, h text height)
Top Overlay:
  drawing of 44 lines, arcs and shapes, not listed
  text "ML1" at -37.592,22.606 h4 r180
  text "ML2" at -22.86,22.606 h4 r180
  text "MR2" at 29.464,22.606 h4 r180
  text "MR1" at 43.307,22.606 h4 r180
  text "SPIN" at -13.335,22.573 h3 r180
  text "Bluetooth" at 16.256,22.563 h3 r180
  text "STMicroelectronics" at 7.113,-7.61 h1.2
  text "ADC" at 47.625,-19.639 h4
  text "{" at 47.117,-21.214 h15
  text "SHOOT" at -64.643,-26.747 h4
  text "CAP" at -60.198,-35.387 h4
  text "{" at 33.733,-48.641 h20 r270
  text "I2C" at 34.163,-52.024 h4
Bottom Overlay:
  drawing of 31 lines, arcs and shapes, not listed
  text "RCJ SOCCER 2025" at 12.142,-7.436 h3
  text "DANGER" at -34.544,-28.544 h2.5
  text "HIGH VOLTAGE" at -34.671,-30.589 h1.4
  text "PB15 -> ML1      PB9 -> PWM1 / PB14 -> ML2      PB8 -> PWM2 / PB13 -> MR2     PB7 -> PWM3 / PB12 -> MR1     PB6 -> PWM4 /  / PC14 -> Spin     / PC15 -> SHOOT / PB9 -> BOOST PWM / PA15 -> ROBOT ID / PA12 -> SW1 / PA11 -> DIP1 /  /  / PC13 -> MUX Address 4 / PB5   -> MUX Address 3 / PB1   -> MUX Address 2 / PA7   -> MUX Address 1" at 12.065,-41.656 h2
Top Solder:
  lines w0.3: -65.778,23.941 ccw(c0,0) 65.778,23.941 -65.778,23.941 ; -59.182,-11.303 -59.182,11.176 -48.133,11.176 -48.133,-11.303 -59.182,-11.303 ; 49.149,-9.906 58.987,-9.906 58.987,10.033 49.149,10.033 49.149,-9.906
Bottom Solder:
  lines w0.3: -65.778,23.941 ccw(c0,0) 65.778,23.941 -65.778,23.941 ; -59.182,-11.303 -59.182,11.176 -48.133,11.176 -48.133,-11.303 -59.182,-11.303 ; 49.149,-9.906 49.149,10.033 58.987,10.033 58.987,-9.906 49.149,-9.906
Mechanical 1:
  lines w0.3: -65.776,23.941 ccw(c0.002,0) 65.781,23.941 -65.776,23.941 ; -59.182,-11.303 -48.133,-11.303 -48.133,11.176 -59.182,11.176 -59.182,-11.303 ; 49.149,-9.906 49.149,10.033 58.987,10.033 58.987,-9.906 49.149,-9.906

## Text inside footprints (layer, text, board x,y; h text height)
C25: Top Overlay "+" at 64.008,15.748 h1.52; Top Overlay "-" at 58.674,15.748 h1.52
C26: Top Overlay "+" at 66.167,5.461 h1.52; Top Overlay "-" at 60.833,5.461 h1.52
C27: Top Overlay "+" at -66.167,11.43 h1.52 r180; Top Overlay "-" at -60.833,11.43 h1.52 r180
C28: Top Overlay "+" at -64.008,21.59 h1.52 r180; Top Overlay "-" at -58.674,21.59 h1.52 r180
C29: Top Overlay "+" at -66.802,1.143 h1.52 r180; Top Overlay "-" at -61.468,1.143 h1.52 r180
j19: Top Overlay "-" at -40.767,-53.594 h1.52 r270; Top Overlay "+" at -23.622,-53.594 h1.52 r270
J20: Top Overlay "+" at -25.781,-62.992 h1.52 r270; Top Overlay "-" at -28.321,-62.992 h1.52 r270
S1: Top Overlay "ON" at -1.135,-61.708 h0.5 r180
U5: Top Overlay "OLED SH1106" at 45.413,-52.138 h0.8 r90; Top Overlay "SDA" at 40.423,-28.983 h0.5; Top Overlay "SCL" at 37.883,-28.983 h0.5; Top Overlay "GND" at 35.343,-28.983 h0.5; Top Overlay "VCC" at 32.803,-28.983 h0.5
U6: Top Overlay "GND" at 11.53,-34.759 h0.8; Top Overlay "VIN" at 11.664,-32.219 h0.8; Top Overlay "P5 (SDA)" at -13.79,-29.679 h0.8; Top Overlay "P4 (SCL)" at -13.79,-27.266 h0.8; Top Overlay "RST" at 11.53,-16.979 h0.8; Top Overlay "BOOT" at 10.731,-19.519 h0.8; Top Overlay "SYN" at 11.53,-22.059 h0.8; Top Overlay "P9" at 12.33,-24.599 h0.8; Top Overlay "P8" at 12.33,-27.139 h0.8; Top Overlay "P7" at 12.33,-29.679 h0.8; Top Overlay "P6" at -13.79,-32.219 h0.8; Top Overlay "3.3V" at -13.79,-34.759 h0.8; Top Overlay "P3" at -13.79,-24.599 h0.8; Top Overlay "P2" at -13.79,-22.059 h0.8; Top Overlay "P1" at -13.79,-19.519 h0.8; Top Overlay "P0" at -13.79,-16.979 h0.8
U9: Top Overlay "HC05" at 7.804,11.718 h1.52